# Altium PCB PCB1.PcbDoc
Units mm, origin at the board's own origin, x right, y up, seen from the top; angles counter-clockwise.
Board outline 92.08 x 120.02 mm, 2 copper layers (Top Layer, Bottom Layer); 2 components, 2 nets, 8 pads, 5 vias.
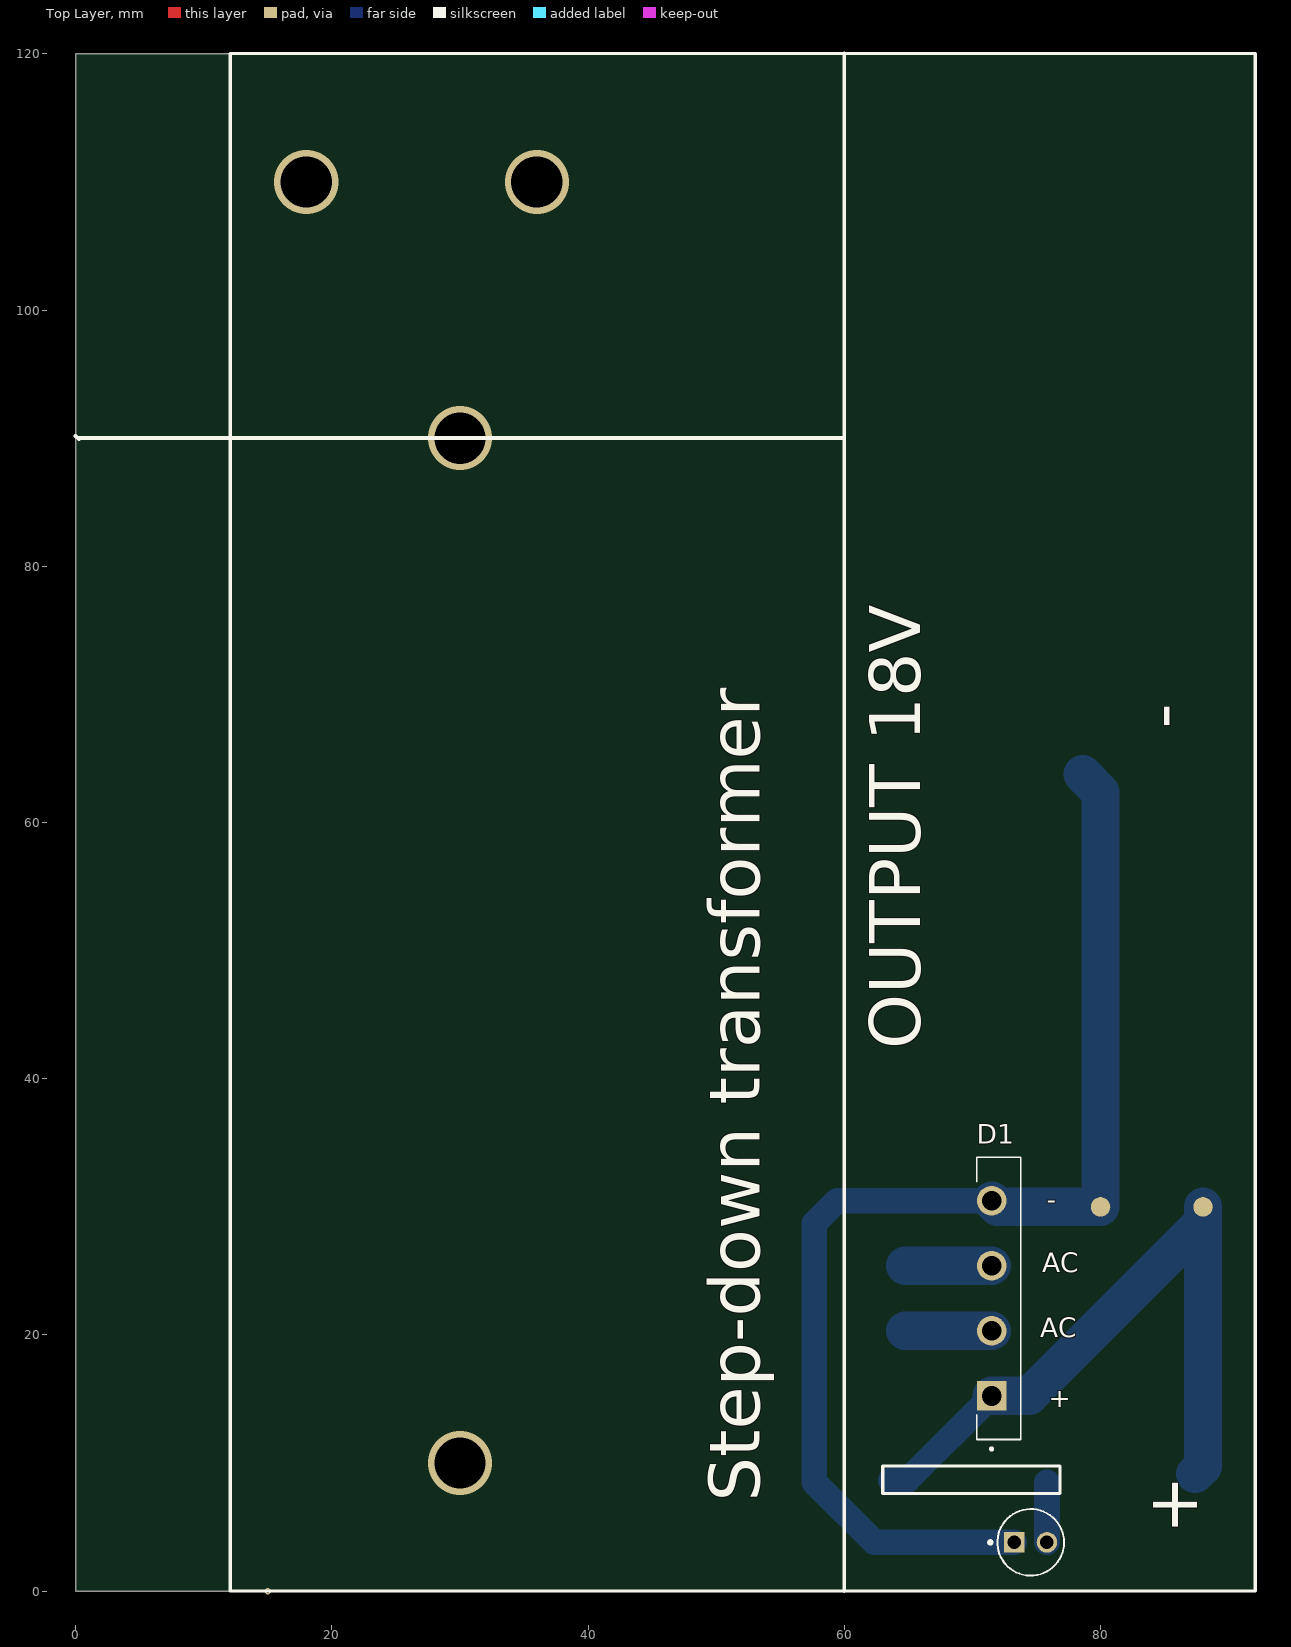
[diagram p0: Top Layer view]
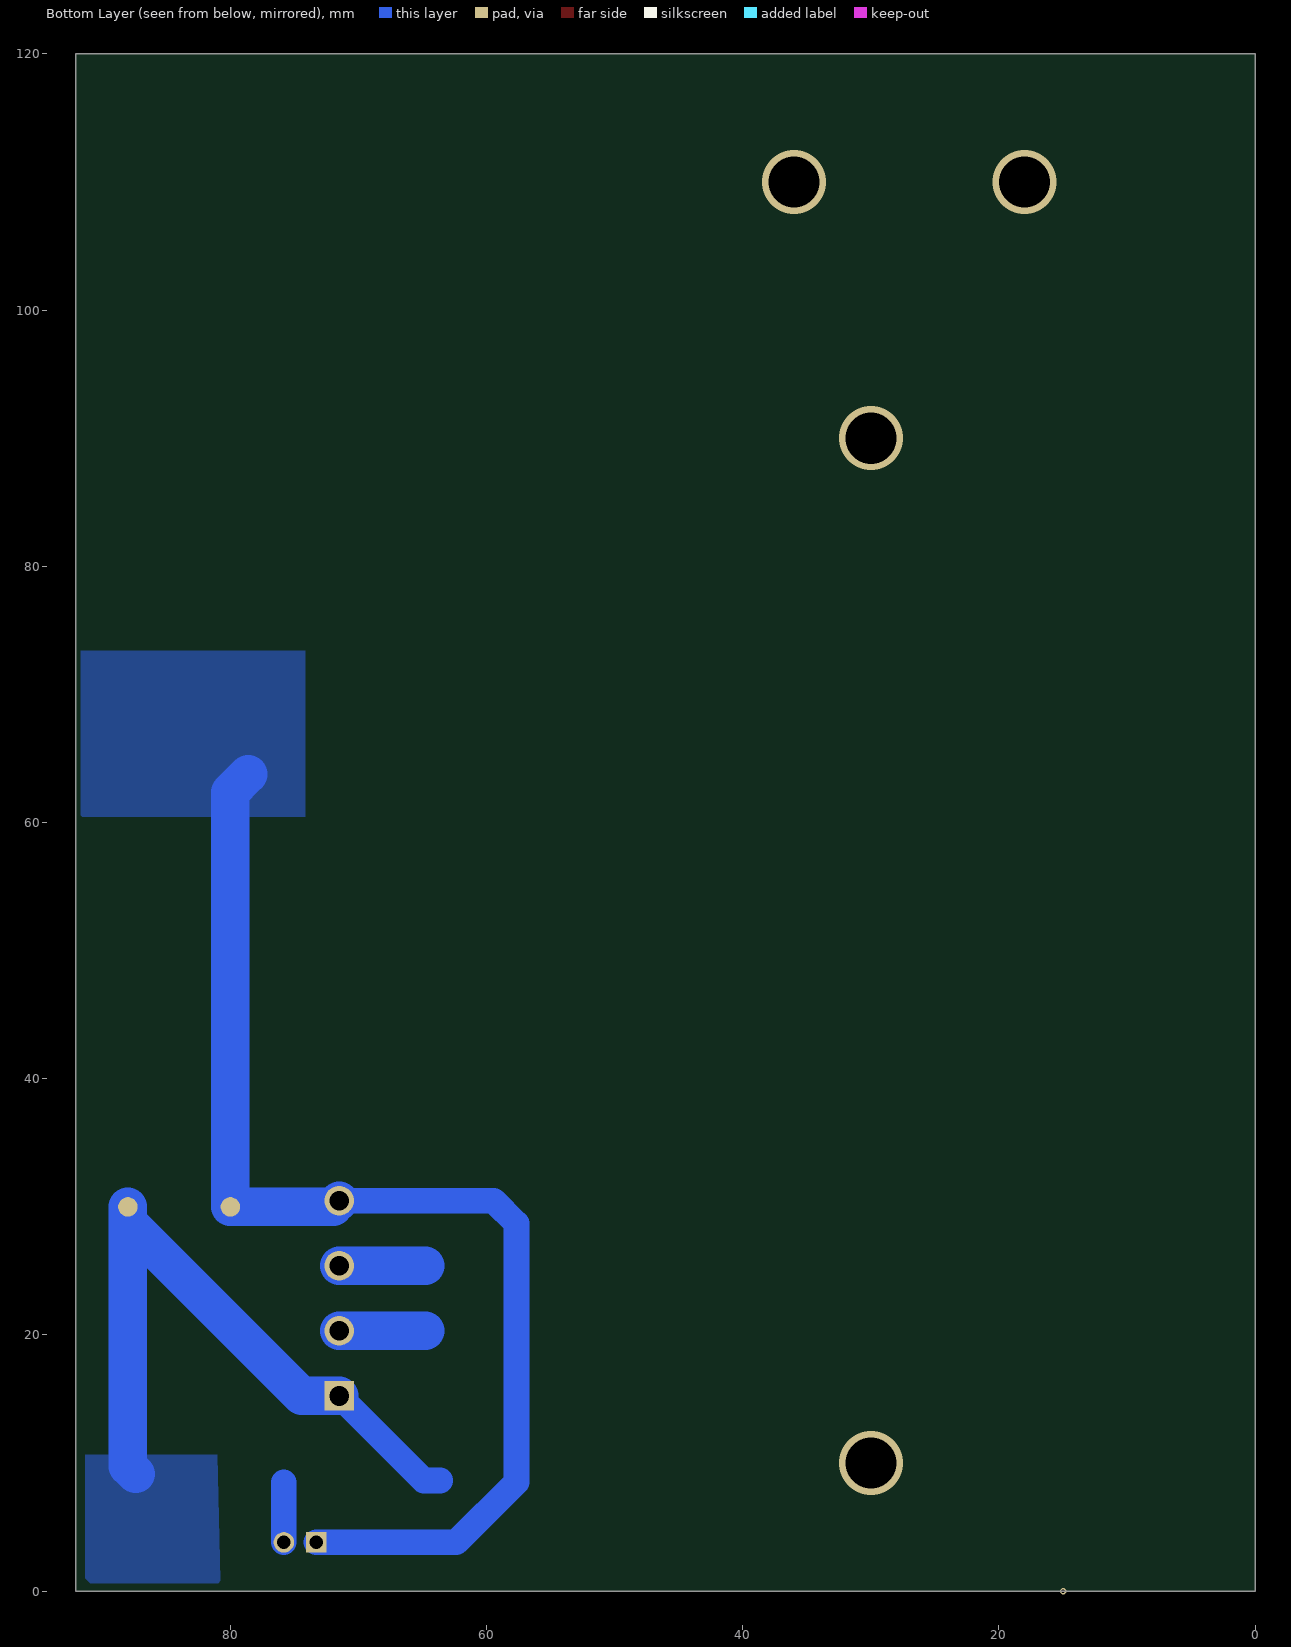
[diagram p1: Bottom Layer view, seen from below]

## Layer stack, top to bottom
Top Solder: solder mask 0.0102, Solder Resist, Dk 3.5
Top Layer: signal copper 0.0356
Dielectric 1: dielectric 0.32, FR-4, Dk 4.8
Bottom Layer: signal copper 0.0356
Bottom Solder: solder mask 0.0102, Solder Resist, Dk 3.5

## Board outline
0,120.015 0,0 92.075,0 92.075,120.015

## Design rules (kind name [scope] priority, off if disabled: settings)
Clearance [All] p1: gap=0.254 ignorepadtopadclearanceinfootprint=FALSE
PolygonConnect [All] p1: connectstyle=Relief reliefconductorwidth=0.254 reliefentries=4 polygonreliefangle="90 Angle" airgapwidth=0.254
RoutingVias [All] p1: holewidth=0.711 width=1.27 viastyle="Through Hole" minholewidth=0.711 minwidth=1.27 maxholewidth=0.711 maxwidth=1.27
SolderMaskExpansion [All] p1: expansion=0.102 istentingtop=FALSE
Width [All] p1: maxlimit=4 minlimit=0.254 preferedwidth=0.254
30 further rules are at their usual default settings.

## Classes and differential pairs
component class Sheet1: D1

## Components (designator, comment, footprint, x,y, rotation, side; value= is the part's Value field where it differs from the comment)
D1 "GBU606" SIP343W114P508L2205H2134Q4 72.061,22.86 r90 top
D? "TLLG4400-AS12" FP-6_544-5255_01-4-MFG 74.549,3.81 r0 top

## Footprints (in the part's own frame and the unit in brackets; to place one, negate y for a bottom-side part, rotate by r counter-clockwise, add the part's x,y. Pads: shape width x height; smd on the part's side, far side on the other; paste and mask are expansions set on the pad)
FP-6_544-5255_01-4-MFG [mm]
  rect 1.6x1.6 hole 1.05 paste-2539.97 mask+0: 1(-1.27,0)
  round 1.6 hole 1.05 paste-2539.97 mask+0: 2(1.27,0)
  silkscreen extent -3.27,-2.6 2.6,2.6, body extent -2.32,-2.32 2.32,2.32, height 0.25
SIP343W114P508L2205H2134Q4 [mm]
  round 2.31 hole 1.54: AC1(-2.54,0.56) AC2(2.54,0.56) NEG(7.62,0.56)
  rect 2.31x2.31 / inner round 2.31 / far side rect 2.31x2.31 hole 1.54: POS(-7.62,0.56)
  silkscreen extent -11.86,-1.72 11.02,1.72, body extent -11.02,-1.72 11.02,1.72, height 21.55

## Part data
D1: "6A 600V Bridge Rectifier Case GBU", Package="SIP-4 Diodes Incorporated", Check_prices=https://www.snapeda.com/parts/GBU606/Diodes+Inc./view-part/?ref=eda, MF="Diodes Inc.", MP=GBU606, SnapEDA_Link=https://www.snapeda.com/parts/GBU606/Diodes+Inc./view-part/?ref=snap
D?: library part CMP-02520-000017-1, "LED GREEN DIFFUSED T-1 T/H", Case/Package=T, Color=Green, Forward Current=7mA, Forward Voltage=2.4V, Max Operating Temperature=100°C, Min Operating Temperature=-40°C, Power Dissipation=20mW, Reverse Voltage=20V, Test Current=2mA, Depth=3.2mm, Dominant Wavelength=575nm, Length=3.2mm, Lens Style=Diffused, Luminous Intensity=2mcd, Mount="Through Hole", Number of Elements=1, Number of LEDs=1, Number of Pins=2, Packaging="Tape and Reel", Radiation Hardening=No, RoHS Compliant=No, Viewing Angle=50°

## Free pads (board coordinates)
  round 1.524 all layers, no hole: -(80,30) Hole_48(88,30)

## Via types
v1: diameter 5, hole 4, Top Layer to Bottom Layer, 4 vias
v2: diameter 0.5, hole 0.3, Top Layer to Bottom Layer, 1 vias

## Nets (pads, with @x,y where several pads share a name; then routed paths per layer and width w, separated by ;. In a path a pad name is that pad's centre, name@x,y a point inside that pad or via, vN(x,y) a via of type N, cw(c..) or ccw(c..) an arc to the next point about the centre after c; other vN are vias at no path point)
+: D1.POS pad.Hole_48 | length 55
  Bottom Layer w2: 63.627,8.636 64.897,8.636 D1.POS
  Bottom Layer w3: D1.POS 74.422,15.24 88,28.818 pad.Hole_48 88,9.768 87.376,9.144
NetD1_NEG: D1.NEG D?.1 | length 95.4
  Bottom Layer w2: D1.NEG 59.436,30.48 57.658,28.702 57.658,8.509 62.357,3.81 D?.1
  Bottom Layer w3: D1.NEG 71.981,30 80,30 80,62.367 78.613,63.754
pads on no net: D1.AC1 D1.AC2 D?.2
copper on no net: | length 18.2
  Bottom Layer w2: 75.819,3.81 75.819,8.509
  Bottom Layer w3: 64.77,20.32 71.501,20.32 ; 64.77,25.4 71.501,25.4
  other v1: 30,10 30,90 18,110 36,110
  other v2: 15,0

## Polygon pours and split planes (outlines as drawn)
no net on Bottom Layer "NONET_L-01_P-001" (solid, pour order 3): 81.026,10.668 91.313,10.668 91.313,1.016 90.932,0.635 80.772,0.635
no net on Bottom Layer "NONET_L-01_P-001" (solid, pour order 0): 74.168,73.406 91.694,73.406 91.694,60.579 91.567,60.452 74.168,60.452

## Silkscreen, mask and mechanical layers (free items; w line width, h text height)
Top Overlay:
  lines w0.254: 12.075,0.015 92.075,0.015 92.075,120.015 12.075,120.015 12.075,0.015 ; 62.992,7.62 76.835,7.62 76.835,9.779 62.992,9.779 62.992,7.62
  lines w0.3: 0,90.17 0.254,89.916 ; 0.254,90 59.817,90 ; 60,0 60,120.015
  text "-" at 86.708,67.31 h4 r90
  text "OUTPUT 18V" at 65.913,42.291 h4 r90
  text "-" at 75.819,29.845 h1.52
  text "AC" at 75.438,24.892 h1.52
  text "AC" at 75.311,19.812 h1.52
  text "+" at 75.946,14.351 h1.52
  text "Step-down transformer" at 53.404,6.985 h4 r90
  text "+" at 87.534,4.445 h4 r90